# Allegro board moving_head.brd
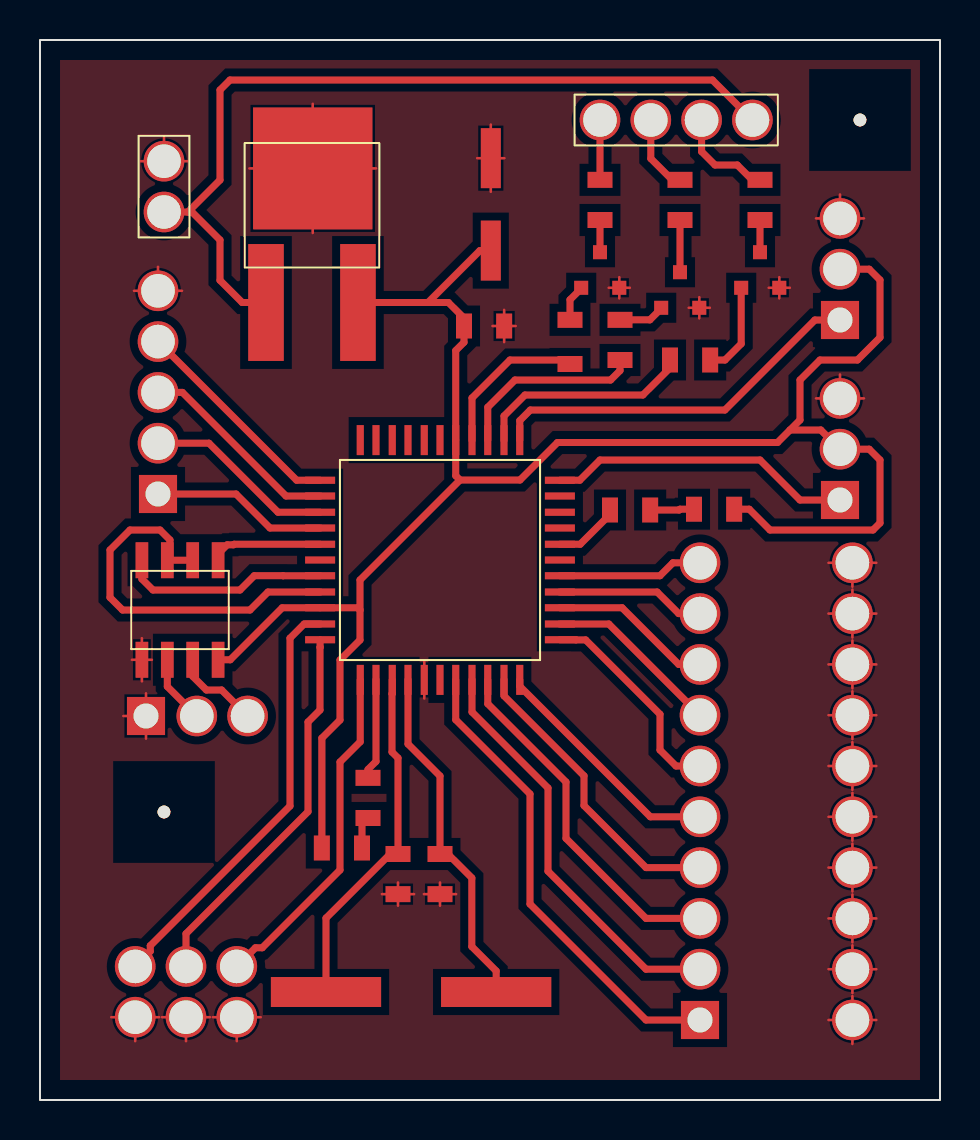
[diagram p0: board, top side]
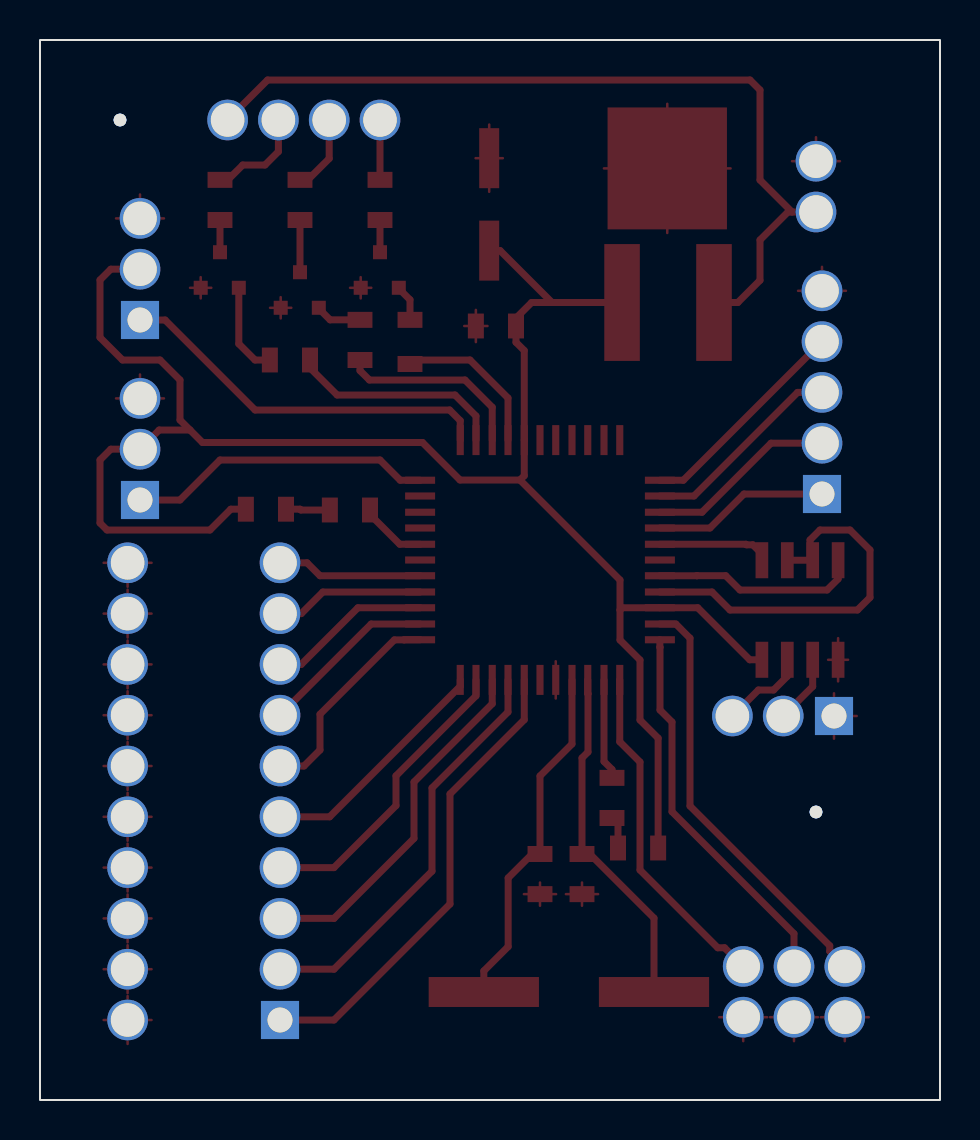
[diagram p1: board, bottom side, seen from below]

Outline 45 x 53 mm; copper layers: TOP, BOTTOM. Coordinates in mm from the lower left corner of the outline.
Outline path: rectangle 0,0 45,53

## Placement (name value [footprint] x y rotation side)
C1  27pF  [FG0805C]  17.9 12.3 270 top
C2  27pF  [FG0805C]  20 12.3 270 top
C6  100uF  [FGCAP6377]  22.54 44.78 0 top
C7  100nF  [FG0805C]  21.2 38.7 0 top
J1  POWER  [JUMPER2]  6.2 44.4 90 top
J2  ADRESS  [FGDIP10]  33 4 180 bottom
J3  JUMPER3  [FGJUMPER3]  4.76 6.68 270 top
J4  ISP  [FGCONN5]  5.9 30.3 0 top
J6  DMX  [FGCONN3]  5.3 19.2 270 top
J7  CON4  [JUMPER4]  28 49 0 top
J8  CON3  [FGCONN3]  40 39 0 top
J9  CON3  [FGCONN3]  40 30 0 top
LED1  RED  [FG0805R]  16.1 12.6 180 top
LED2  GREEN  [FG0805R]  32.7 29.54 0 top
MC1  ATMEGA8515-16AU_0  [TQFP44]  20 27 0 top
NOREF  -  [unnamed]  41 49 0 top
NOREF#2  -  [unnamed]  6.2 14.4 0 top
Q1  MOSFET N  [SOT23]  28 41.5 90 top
Q2  MOSFET N  [SOT23]  32 40.5 90 top
Q3  MOSFET N  [SOT23]  36 41.5 90 top
R2  390  [FG0805R]  16.4 14.1 90 top
R3  390  [FG0805R]  28.5 29.5 0 top
R4  RESISTOR  [FG0805R]  26.5 37 90 top
R5  RESISTOR  [FG0805R]  29 37 90 top
R6  RESISTOR  [FG0805R]  31.5 37 0 top
R7  RESISTOR  [FG0805R]  28 44 90 top
R8  RESISTOR  [FG0805R]  32 44 90 top
R9  RESISTOR  [FG0805R]  36 44 90 top
U1  78HT2  [TO252AA]  11.3 39.9 0 top
U2  75176  [SO8]  7 24.5 270 top
Y1  8MHz  [FGXTAL]  14.3 5.4 0 top

## Library data of the parts
C1 C2 C7 = CAP NP
C6 = CAP
J1 = CON2: User Part Number: ***
J2 = JUMPER10
J3 = JUMPER3: User Part Number: ***
J4 = CON5
J6 J8 J9 = CON3
J7 = CON4: User Part Number: ***
LED1 LED2 = LED
MC1 = ATMEGA8515-16AU_0
Q1-Q3 = MOSFET N_0
R2-R9 = RESISTOR
U1 = 78HT2
U2 = 75176_0
Y1 = CRYSTAL

## Footprints (pads in the part's own frame, mm; a bottom-side part is the same pattern mirrored in y, then rotated)
FG0805C
  rect 0.8x1.245 smd: 1(0,0) 2(2.007,0)
FG0805R
  rect 0.8x1.245 smd: 1(0,0) 2(2.007,0)
FGCAP6377
  rect 1x3 smd: 1(0,-2.311) 2(0,2.311)
FGCONN3
  rect 1.905x1.905 hole 1.245: 1(0,0)
  round 2.032 hole 1.676: 2(0,2.54) 3(0,5.08)
FGCONN5
  rect 1.905x1.905 hole 1.245: 1(0,0)
  round 2.032 hole 1.676: 2(0,2.54) 3(0,5.08) 4(0,7.62) 5(0,10.16)
FGDIP10
  rect 1.905x1.905 hole 1.245: 1(0,0)
  round 2.032 hole 1.676: 2(-7.62,0) 3(0,2.54) 4(-7.62,2.54) 5(0,5.08) 6(-7.62,5.08) 7(0,7.62) 8(-7.62,7.62) 9(0,10.16) 10(-7.62,10.16) 11(0,12.7) 12(-7.62,12.7) 13(0,15.24) 14(-7.62,15.24) 15(0,17.78) 16(-7.62,17.78) 17(0,20.32) 18(-7.62,20.32) 19(0,22.86) 20(-7.62,22.86)
FGJUMPER3
  round 2.032 hole 1.676: 1(0,0) 2(2.54,0) 3(0,2.54) 4(2.54,2.54) 5(0,5.08) 6(2.54,5.08)
FGXTAL
  rect 5.512x1.499 smd: 1(0,0) 2(8.509,0)
JUMPER2
  round 2.032 hole 1.676: 1(0,0) 2(2.54,0)
JUMPER4
  round 2.032 hole 1.676: 1(0,0) 2(2.54,0) 3(5.08,0) 4(7.62,0)
SO8
  rect 1.8x0.635 smd: 1(-2.489,1.905) 2(-2.489,0.635) 3(-2.489,-0.635) 4(-2.489,-1.905) 5(2.489,-1.905) 6(2.489,-0.635) 7(2.489,0.635) 8(2.489,1.905)
SOT23
  rect 0.7x0.7 smd: 1(-0.889,0.94) 2(-0.889,-0.965) 3(0.889,0)
TO252AA
  rect 1.778x5.842 smd: 1(0,-0.025) 3(4.597,-0.025)
  rect 5.969x6.096 smd: 2(2.337,6.68)
TQFP44
  rect 1.5x0.356 smd: 1(-5.994,3.988) 2(-5.994,3.2) 3(-5.994,2.388) 4(-5.994,1.6) 5(-5.994,0.787) 6(-5.994,0) 7(-5.994,-0.787) 8(-5.994,-1.6) 9(-5.994,-2.388) 10(-5.994,-3.2) 11(-5.994,-3.988) 23(5.994,-3.988) 24(5.994,-3.2) 25(5.994,-2.388) 26(5.994,-1.6) 27(5.994,-0.787) 28(5.994,0) 29(5.994,0.787) 30(5.994,1.6) 31(5.994,2.388) 32(5.994,3.2) 33(5.994,3.988)
  rect 0.356x1.5 smd: 12(-3.988,-5.994) 13(-3.2,-5.994) 14(-2.388,-5.994) 15(-1.6,-5.994) 16(-0.787,-5.994) 17(0,-5.994) 18(0.787,-5.994) 19(1.6,-5.994) 20(2.388,-5.994) 21(3.2,-5.994) 22(3.988,-5.994) 34(3.988,5.994) 35(3.2,5.994) 36(2.388,5.994) 37(1.6,5.994) 38(0.787,5.994) 39(0,5.994) 40(-0.787,5.994) 41(-1.6,5.994) 42(-2.388,5.994) 43(-3.2,5.994) 44(-3.988,5.994)
unnamed
  round 0.635 hole 3.175 unplated: (0,0)

## Nets
GND: C1.2 C2.2 C6.2 C7.2 J1.2 J2.2 J2.4 J2.6 J2.8 J2.10 J2.12 J2.14 J2.16 J2.18 J2.20 J3.2 J3.4 J3.6 J4.5 J6.1 J8.3 J9.3 MC1.16(GND) Q1.2(SOURCE) Q2.2(SOURCE) Q3.2(SOURCE) U1.2 U2.5
VCC_5V: C6.1 C7.1 J8.2 J9.2 LED1.2(ANODE) LED2.2(ANODE) MC1.9(PD3 (INT1)) MC1.38(VCC) U1.3(VOUT) U2.8
VCC_12: J1.1 J7.4 U1.1(VIN)
N07168: MC1.29(PE0 (ICP/INT2)) R3.1
N07188: LED2.1(CATHODE) R3.2
N07198: MC1.13(PD7 (RD)) R2.2
N07234: LED1.1(CATHODE) R2.1
N07244: J2.9 MC1.22(PC4 (A12))
N07304: J2.1 MC1.18(PC0 (A8))
N07312: J2.3 MC1.19(PC1 (A9))
N07320: J2.5 MC1.20(PC2 (A10))
N07328: J2.7 MC1.21(PC3 (A11))
N07336: J2.11 MC1.23(PC5 (A13))
N07344: J2.13 MC1.24(PC6 (A14))
N07356: J2.15 MC1.25(PC7 (A15))
N07368: J2.17 MC1.26(PE2 (OC1B))
N07380: J2.19 MC1.27(PE1 (ALE))
N07416: J3.5 MC1.12(PD6 (WR))
N07428: J3.1 MC1.10(PD4 (XCK))
N07440: J3.3 MC1.11(PD5 (OC1A))
N07484: MC1.8(PD2 (INT0)) U2.2(RE) U2.3(DE)
N07488: MC1.5(PD0 (RXD)) U2.1(R)
N07496: MC1.7(PD1 (TXD)) U2.4(D)
N07530: J4.1 MC1.4(RESET)
N07538: J4.2 MC1.3(PB7 (SCK))
N07550: J4.3 MC1.2(PB6 (MISO))
N07562: J4.4 MC1.1(PB5 (MOSI))
N07674: MC1.36(PA1 (AD1)) R5.1
N07682: MC1.37(PA0 (AD0)) R4.1
N07798: J6.3 U2.7(B)
N07802: J6.2 U2.6(A)
N07854: C1.1 MC1.14(XTAL1) Y1.1
N07866: C2.1 MC1.15(XTAL2) Y1.2
N08332: Q3.1(GATE) R6.2
N08486: Q1.3(DRAIN) R7.1
N08516: Q3.3(DRAIN) R9.1
N09245: J8.1 MC1.34(PA3 (AD3))
N09263: J9.1 MC1.33(PA5 (AD4))
N12660: MC1.35(PA2 (AD2)) R6.1
N12693: Q1.1(GATE) R4.2
N12697: Q2.1(GATE) R5.2
N13361: J7.3 R9.2
N13371: J7.2 R8.2
N13383: J7.1 R7.2
N13403: Q2.3(DRAIN) R8.1

Pads without a net: MC1 6 17 28 30 31 32 39 40 41 42 43 44

## Routing (per net, layer and track width the routed paths; a pad name or vN(x,y) marks a point on that pad's centre or on a via; arc(x,y) is an arc through that point)
GND: length 112.3
  TOP w0.127: 6.1,4.14 J3.4 ; J3.4 8.5,4.14 ; J3.4 7.3,2.94 ; J2.8 41.82,11.62 ; J2.8 39.42,11.62 ; J2.8 40.62,12.82 ; J2.8 40.62,10.42 ; 23.21,37.9 C7.2 ; C7.2 23.21,39.5 ; C7.2 22.63,38.7 ; C7.2 23.79,38.7 ; 40.62,20.58 J2.16 ; J2.16 40.62,22.98 ; J2.16 41.82,21.78 ; J2.16 39.42,21.78 ; U1.2 16.8,46.58 ; U1.2 13.64,49.81 ; U1.2 13.64,43.35 ; U1.2 10.47,46.58 ; 4.6,22.01 5.1,22.01 ; 5.1,22.01 5.1,23.09 ; 5.1,22.01 5.59,22.01 ; 5.1,22.01 5.1,20.93 ; 40.62,15.5 J2.12 ; J2.12 40.62,17.9 ; J2.12 41.82,16.7 ; J2.12 39.42,16.7 ; 39.42,26.86 J2.20 ; J2.20 40.62,25.66 ; J2.20 41.82,26.86 ; 4.76,2.94 J3.2 ; J3.2 3.56,4.14 ; J3.2 5.96,4.14 ; 28.96,40.08 Q1.2 ; Q1.2 29.5,40.61 ; Q1.2 28.96,41.14 ; Q1.2 28.43,40.61 ; J2.10 40.62,15.36 ; J2.10 41.82,14.16 ; J2.10 40.62,12.96 ; J2.10 39.42,14.16 ; J8.3 40,45.28 ; J8.3 38.8,44.08 ; J8.3 41.2,44.08 ; Q2.2 33.5,39.61 ; Q2.2 32.44,39.61 ; Q2.2 32.97,39.08 ; Q2.2 32.97,40.14 ; 8.64,4.14 J3.6 ; J3.6 11.04,4.14 ; J3.6 9.84,2.94 ; J2.14 41.82,19.24 ; J2.14 40.62,20.44 ; J2.14 40.62,18.04 ; J2.14 39.42,19.24 ; 19.21,21.94 MC1.16 19.21,20.08 ; 17.9,10.29 17.9,10.87 ; 17.9,10.29 17.9,9.71 ; 17.9,10.29 17.1,10.29 ; 17.9,10.29 18.7,10.29 ; J6.1 5.3,20.33 ; J6.1 4.17,19.2 ; J6.1 5.3,18.07 ; J9.3 41.2,35.08 ; J9.3 40,36.28 ; J9.3 38.8,35.08 ; 20,10.29 20.8,10.29 ; 20,10.29 20,9.71 ; 20,10.29 20,10.87 ; 20,10.29 19.2,10.29 ; 5,46.94 J1.2 ; J1.2 7.4,46.94 ; J1.2 6.2,48.14 ; J2.4 41.82,6.54 ; J2.4 40.62,5.34 ; J2.4 39.42,6.54 ; J2.4 40.62,7.74 ; J2.18 41.82,24.32 ; J2.18 39.42,24.32 ; J2.18 40.62,25.52 ; J2.18 40.62,23.12 ; J2.6 41.82,9.08 ; J2.6 40.62,7.88 ; J2.6 39.42,9.08 ; J2.6 40.62,10.28 ; 36.97,40.08 Q3.2 ; Q3.2 36.44,40.61 ; Q3.2 37.49,40.61 ; Q3.2 36.97,41.14 ; C6.2 22.54,48.77 ; C6.2 23.22,47.09 ; C6.2 22.54,45.41 ; C6.2 21.86,47.09 ; J4.5 7.1,40.46 ; J4.5 5.9,41.66 ; J4.5 4.7,40.46 ; J2.2 41.82,4 ; J2.2 39.42,4 ; J2.2 40.62,2.8 ; J2.2 40.62,5.2
VCC_5V: length 94
  TOP w0.35: J8.2 41.46,41.54 42,41 42,38.13 40.87,37 39,37 38,36 38,34 37.5,33.5 ; 37.5,33.5 39.04,33.5 J9.2 41.46,32.54 42,32 42,28.85 41.65,28.5 36.5,28.5 35.46,29.54 LED2.2 ; 37.5,33.5 36.88,32.88 25.88,32.88 24,31 21,31 ; 16,24.5 16,23 15,22 15,19 14.09,18.09 LED1.2 ; 16,24.5 15.89,24.61 MC1.9 12.11,24.61 9.51,22.01 U2.8 ; 16,24.5 16,26 21,31 ; 21,31 20.79,31.21 MC1.38 20.79,37.47 21.2,37.89 C7.1 21.2,39.09 20.42,39.88 19.4,39.88 ; 19.4,39.88 21.99,42.47 C6.1 ; 19.4,39.88 15.9,39.88
VCC_12: length 42.6
  TOP w0.35: 7.4,44.4 7.6,44.4 9,43 9,40.98 10.11,39.88 U1.1 ; 7.4,44.4 9,46 9,50.5 9.5,51 33.62,51 J7.4 ; 7.4,44.4 J1.1
N07168: length 3.3
  TOP w0.35: R3.1 28.5,29.28 27.01,27.79 MC1.29
N07188: length 2.2
  TOP w0.35: R3.2 31.96,29.5 32,29.54 LED2.1
N07198: length 5.1
  TOP w0.35: MC1.13 16.8,16.93 16.4,16.53 R2.2
N07234: length 1.6
  TOP w0.35: R2.1 16.1,13.8 LED1.1
N07244: length 12
  TOP w0.35: MC1.22 23.99,20.69 30.52,14.16 J2.9
N07304: length 23.6
  TOP w0.35: MC1.18 20.79,19.01 24.5,15.3 24.5,9.8 30.3,4 J2.1
N07312: length 20.8
  TOP w0.35: MC1.19 21.6,19.4 25.4,15.6 25.4,11.44 30.3,6.54 J2.3
N07320: length 17.9
  TOP w0.35: J2.5 30.3,9.08 26.3,13.08 26.3,15.9 22.39,19.81 MC1.20
N07328: length 15
  TOP w0.35: J2.7 30.3,11.62 27.2,14.72 27.2,16.21 23.2,20.21 MC1.21
N07336: length 10.7
  TOP w0.35: J2.11 31.8,16.7 31,17.5 31,19.29 27.28,23 26.8,23 26.79,23.01 MC1.23
N07344: length 8.9
  TOP w0.35: J2.13 28.44,23.8 MC1.24
N07356: length 8.2
  TOP w0.35: MC1.25 29.1,24.61 31.94,21.78 J2.15
N07368: length 7.5
  TOP w0.35: J2.17 31.94,24.32 30.86,25.4 MC1.26
N07380: length 7.3
  TOP w0.35: MC1.27 31,26.21 31.65,26.86 J2.19
N07416: length 17.1
  TOP w0.35: MC1.12 16.01,17.91 15,16.9 15,11.5 11.11,7.61 10.77,7.61 J3.5
N07428: length 21.4
  TOP w0.35: J3.1 5.51,7.43 5.51,7.71 12.5,14.7 12.5,23.09 13.21,23.8 MC1.10
N07440: length 19.1
  TOP w0.35: MC1.11 14.01,22.64 14,22.64 14,19.5 13.4,18.9 13.4,14.41 7.3,8.31 J3.3
N07484: length 19.5
  TOP w0.35: U2.2 U2.3 6.5,27.12 6.5,28 6,28.5 4.5,28.5 3.5,27.5 3.5,25.13 4.13,24.5 10.5,24.5 11.4,25.4 MC1.8
N07488: length 5.6
  TOP w0.35: U2.1 8.91,27.31 9.36,27.76 9.68,27.76 9.7,27.79 MC1.5
N07496: length 10.4
  TOP w0.35: MC1.7 12.15,26.21 12.15,26.21 10.71,26.21 10,25.5 5.65,25.5 5.1,26.05 5.1,26.99
N07530: length 8.8
  TOP w0.35: MC1.4 11.5,28.6 9.8,30.3 J4.1
N07538: length 9.5
  TOP w0.35: J4.2 8.45,32.84 11.9,29.39 MC1.3
N07550: length 10.3
  TOP w0.35: MC1.2 12.3,30.2 7.12,35.38 J4.3
N07562: length 11
  TOP w0.35: J4.4 12.83,30.99 MC1.1
N07674: length 9.5
  TOP w0.35: MC1.36 22.39,34.64 23.75,36 28.53,36 29,36.47 R5.1
N07682: length 7.8
  TOP w0.35: R4.1 23.5,37 21.6,35.1 MC1.37
N07798: length 4.4
  TOP w0.35: J6.3 9.08,20.5 8.32,20.5 7.63,21.18 U2.7
N07802: length 3.4
  TOP w0.35: U2.6 6.37,20.68 J6.2
N07854: length 17.5
  TOP w0.35: MC1.14 17.61,20.32 17.6,20.31 17.6,17.4 17.9,17.1 C1.1 17.51,12.3 14.3,9.09 Y1.1
N07866: length 17.7
  TOP w0.35: Y1.2 22.81,6.45 21.59,7.67 21.59,11.1 20.39,12.3 C2.1 20,16.2 18.4,17.8 MC1.15
N08332: length 4.7
  TOP w0.35: R6.2 34.25,37 35.06,37.81 Q3.1
N08486: length 1.6
  TOP w0.35: Q1.3 R7.1
N08516: length 1.6
  TOP w0.35: Q3.3 R9.1
N09245: length 19.1
  TOP w0.35: J8.1 38.74,39 34.24,34.5 24.52,34.5 23.99,33.97 MC1.34
N09263: length 15.3
  TOP w0.35: MC1.33 26.99,30.99 28,32 36,32 38,30 J9.1
N12660: length 10.9
  TOP w0.35: MC1.35 23.2,34.2 24.25,35.25 30.14,35.25 31.5,36.61 R6.1
N12693: length 1.8
  TOP w0.35: Q1.1 27.06,40.57 26.5,40.01 R4.2
N12697: length 2.3
  TOP w0.35: R5.2 30.49,39.01 31.06,39.57 Q2.1
N13361: length 5.1
  TOP w0.35: J7.3 33.08,47.42 33.75,46.75 34.86,46.75 35.61,46.01 R9.2
N13371: length 3.8
  TOP w0.35: J7.2 30.54,47.07 31.61,46.01 R8.2
N13383: length 3
  TOP w0.35: R7.2 J7.1
N13403: length 2.6
  TOP w0.35: Q2.3 R8.1

## Copper pours and planes (outline as drawn; the poured copper is in the pictures)
GND on TOP: 1,1 1,52 44,52 44,1
